# Altium PCB Bus.PcbDoc
Units mm, origin at the board's own origin, x right, y up, seen from the top; angles counter-clockwise.
Board outline 135 x 110 mm, 2 copper layers (Top Layer, Bottom Layer); 31 components, 25 nets, 281 pads, 0 vias.
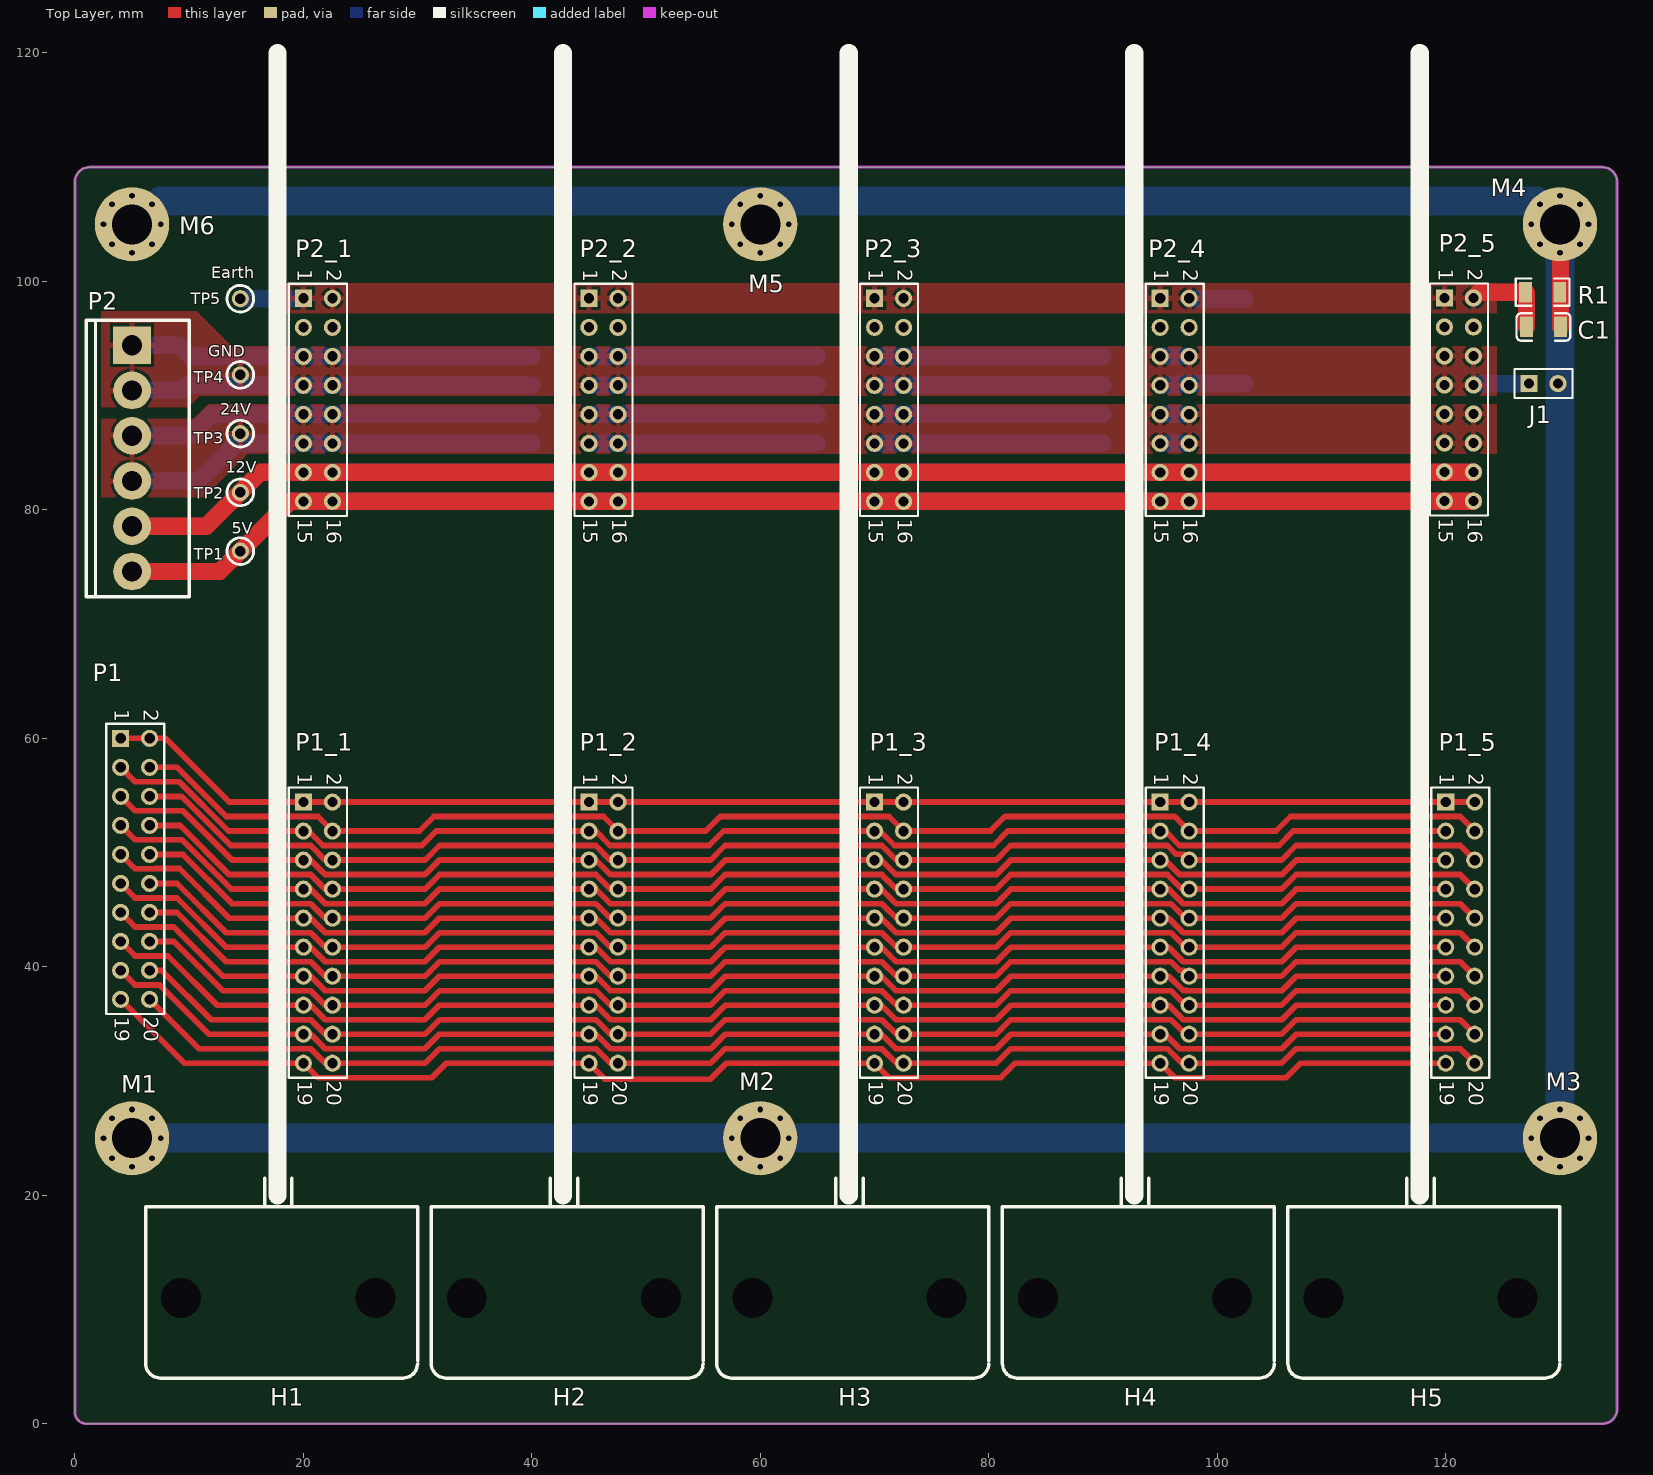
[diagram p0: Top Layer view]
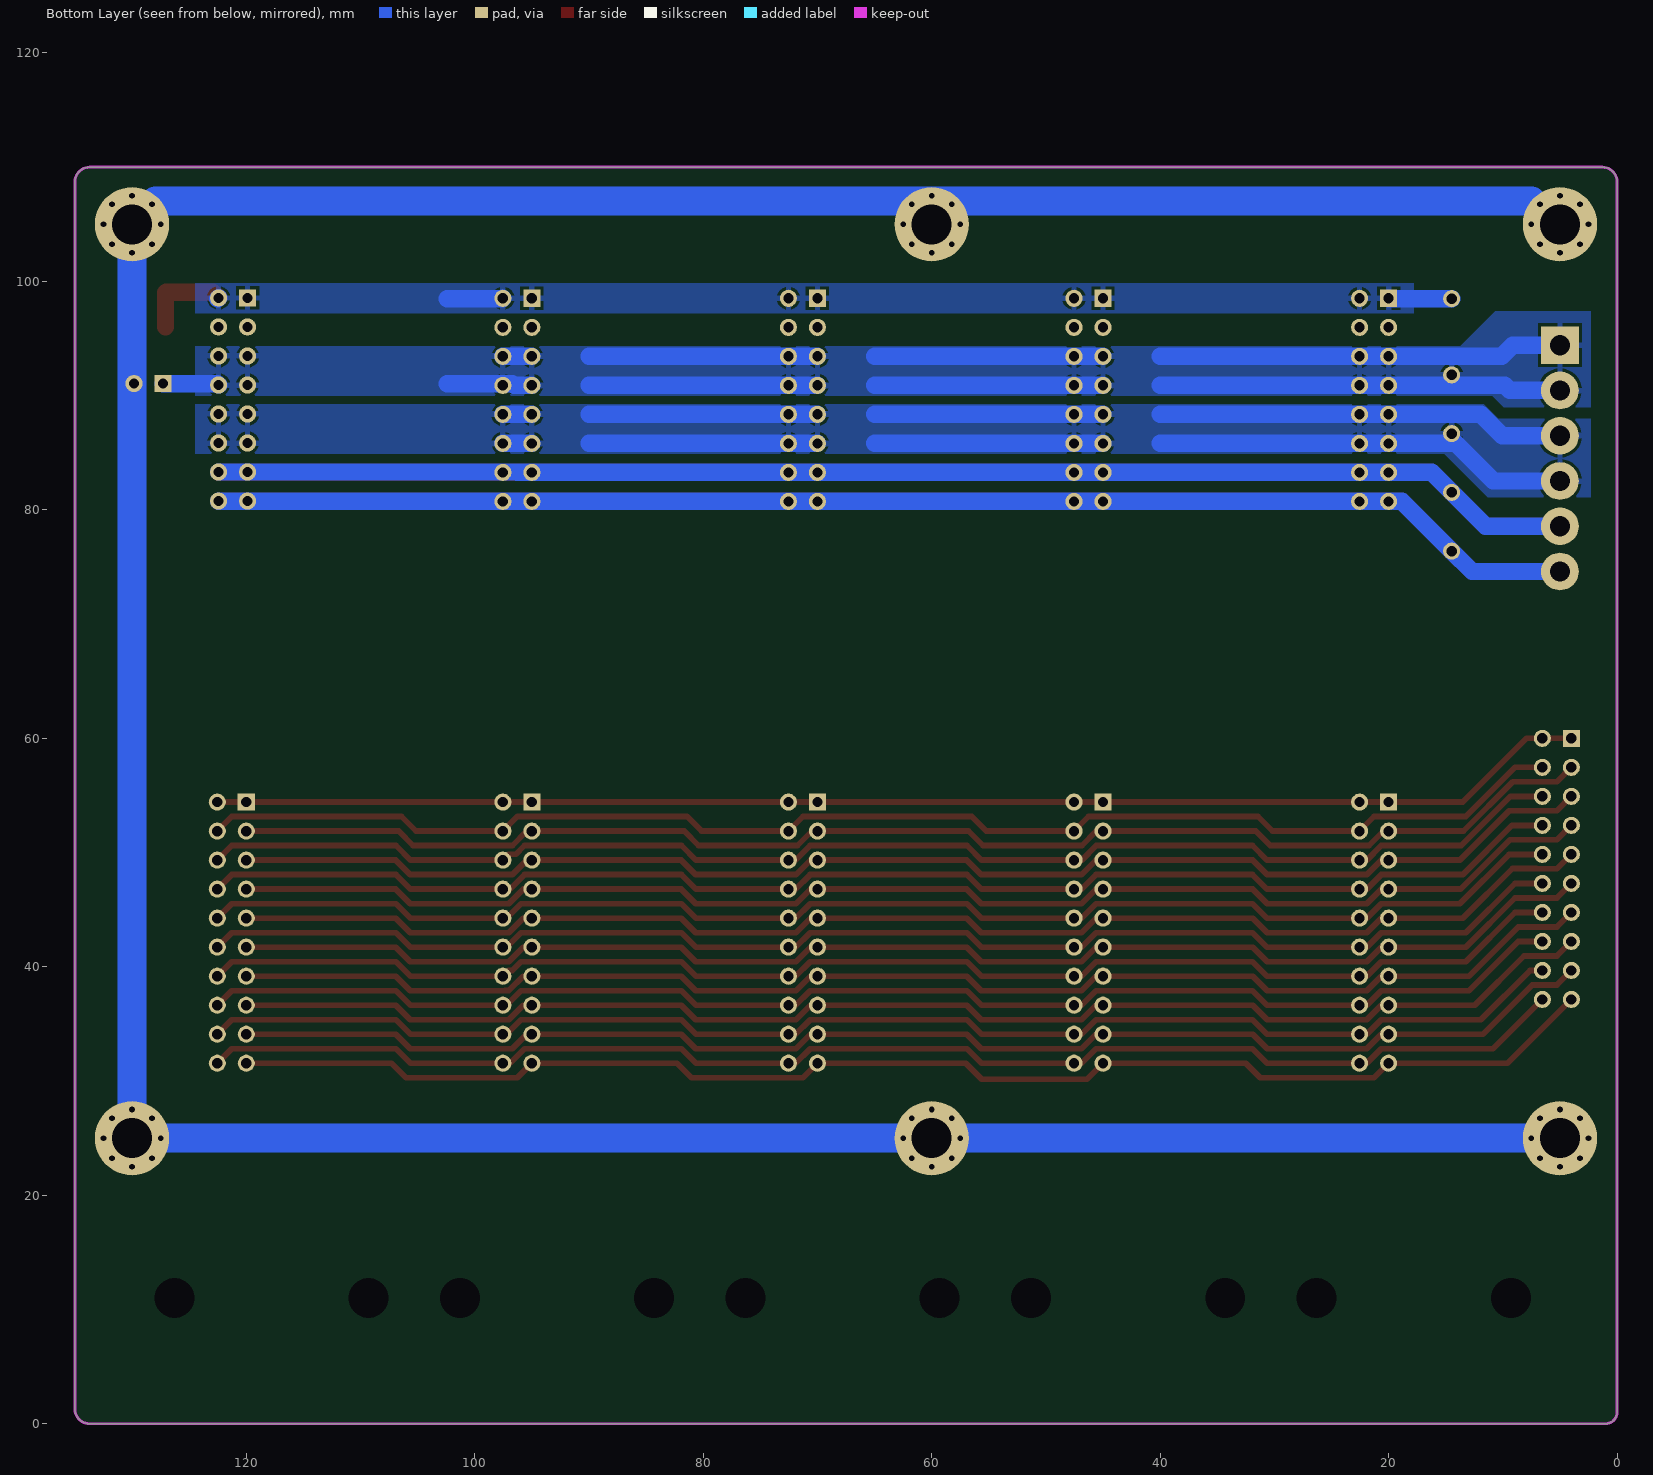
[diagram p1: Bottom Layer view, seen from below]

## Layer stack, top to bottom
Top Solder: solder mask 0.0102, Solder Resist, Dk 3.5
Top Layer: signal copper 0.0356
Dielectric 1: dielectric 0.32, FR-4, Dk 4.8
Bottom Layer: signal copper 0.0356
Bottom Solder: solder mask 0.0102, Solder Resist, Dk 3.5

## Board outline
0,1 ccw(c1,1) 1,0 133.73,0 ccw(c133.73,1.27) 135,1.27 135,108.73 ccw(c133.73,108.73) 133.73,110 1.27,110 ccw(c1.27,108.73) 0,108.73

## Design rules (kind name [scope] priority, off if disabled: settings)
Clearance [All] p1: gap=0.254
PolygonConnect [All] p1: connectstyle=Relief reliefconductorwidth=0.508 reliefentries=4 polygonreliefangle="90 Angle" airgapwidth=0.254
RoomDefinition Bus [InComponentClass('Bus')] p1: confinementstyle=ConfineIn formatcopy=TRUE lockcomponents=FALSE outline 126.426,14.539 157.414,14.539 157.414,24.191 126.426,24.191
RoutingVias [All] p1: holewidth=0.711 width=1.27 viastyle="Through Hole" minholewidth=0.711 minwidth=1.27 maxholewidth=0.711 maxwidth=1.27
SolderMaskExpansion [All] p1: expansion=0.102
Width [All] p1: maxlimit=2.54 minlimit=0.254 preferedwidth=0.508
30 further rules are at their usual default settings.

## Components (designator, comment, footprint, x,y, rotation, side; value= is the part's Value field where it differs from the comment)
C1 "1nF/2KV" 1206_C 128.558,96.012 r180 top
H1 "PCB_HOLD" PCB_HOLD 17.8,11 r180 top
H2 "PCB_HOLD" PCB_HOLD 42.8,11 r180 top
H3 "PCB_HOLD" PCB_HOLD 67.8,11 r180 top
H4 "PCB_HOLD" PCB_HOLD 92.8,11 r180 top
H5 "PCB_HOLD" PCB_HOLD 117.8,11 r180 top
J1 "Header 2" HDR1X2 127.292,91.057 r0 top
M1 "Header 9" LK 5,25 r0 top
M2 "Header 9" LK 60,25 r0 top
M3 "Header 9" LK 130,25 r0 top
M4 "Header 9" LK 130,105 r0 top
M5 "Header 9" LK 60,105 r0 top
M6 "Header 9" LK 5,105 r0 top
P1 "Header 10X2" HDR2X10 4,60 r270 top
P1_1 "Header 10X2" HDR2X10 20,54.417 r270 top
P1_2 "Header 10X2" HDR2X10 45,54.417 r270 top
P1_3 "Header 10X2" HDR2X10 70,54.417 r270 top
P1_4 "Header 10X2" HDR2X10 95,54.417 r270 top
P1_5 "Header 10X2" HDR2X10 120,54.417 r270 top
P2 "Header 6" VH-6 5,94.417 r90 top
P2_1 "Header 8x2" HDR2X8 20,98.519 r270 top
P2_2 "Header 8x2" HDR2X8 45,98.519 r270 top
P2_3 "Header 8x2" HDR2X8 70,98.519 r270 top
P2_4 "Header 8x2" HDR2X8 95,98.519 r270 top
P2_5 "Header 8x2" HDR2X8 119.888,98.552 r270 top
R1 "1M" 1206_R 128.49,99.06 r0 top
TP1 "5V" TP 14.478,76.388 r0 top
TP2 "12V" TP 14.478,81.531 r0 top
TP3 "24V" TP 14.478,86.675 r0 top
TP4 "GND" TP 14.478,91.818 r0 top
TP5 "Earth" TP 14.478,98.486 r0 top

## Footprints (in the part's own frame and the unit in brackets; to place one, negate y for a bottom-side part, rotate by r counter-clockwise, add the part's x,y. Pads: shape width x height; smd on the part's side, far side on the other; paste and mask are expansions set on the pad)
1206_C [mm]
  rect 1.13x1.8 smd: 1(-1.49,0) 2(1.49,0)
  silkscreen extent -2.36,-1.2 2.35,1.2, body extent -1.6,-0.81 1.6,0.79, height 1
1206_R [mm]
  rect 1.13x1.8 smd: 1(-1.49,0) 2(1.49,0)
  silkscreen extent -2.36,-1.2 2.35,1.2, body extent -1.7,-0.86 1.65,0.87, height 0.85
HDR1X2 [mm] "Connector; Header; 2 Position"
  rect 1.5x1.5 hole 0.9: 1(0,0)
  round 1.5 hole 0.9: 2(2.54,0)
  silkscreen extent -1.27,-1.27 3.81,1.27
HDR2X8 [mm] "Connector; Header; 8x2 Position"
  rect 1.5x1.5 hole 0.9: 1(0,0)
  round 1.5 hole 0.9: 2(0,2.54) 3(2.54,0) 4(2.54,2.54) 5(5.08,0) 6(5.08,2.54) 7(7.62,0) 8(7.62,2.54) 9(10.16,0) 10(10.16,2.54) 11(12.7,0) 12(12.7,2.54) 13(15.24,0) 14(15.24,2.54) 15(17.78,0) 16(17.78,2.54)
  silkscreen extent -1.27,-1.27 19.05,3.81
HDR2X10 [mm] "Connector; Header; 10x2 Position"
  rect 1.5x1.5 hole 0.9: 1(0,0)
  round 1.5 hole 0.9: 2(0,2.54) 3(2.54,0) 4(2.54,2.54) 5(5.08,0) 6(5.08,2.54) 7(7.62,0) 8(7.62,2.54) 9(10.16,0) 10(10.16,2.54) 11(12.7,0) 12(12.7,2.54) 13(15.24,0) 14(15.24,2.54) 15(17.78,0) 16(17.78,2.54) 17(20.32,0) 18(20.32,2.54) 19(22.86,0) 20(22.86,2.54)
  silkscreen extent -1.27,-1.27 24.13,3.81
LK [mm]
  round 6.5 hole 3.5: 1(0,0)
  round 1 hole 0.5: 2(0,2.5) 3(2.5,0) 4(0,-2.5) 5(-1.75,-1.75) 6(-1.75,1.75) 7(1.75,1.75) 8(1.75,-1.75) 9(-2.5,0)
PCB_HOLD [mm]
  round 0 hole 3.5 unplated: 1(8.5,0) 2(-8.5,0)
  silkscreen extent -12.19,-10.5 11.61,7
TP [mm] "Connector; Header; 4 Position"
  round 1.5 hole 0.9: 1(0,0)
  silkscreen extent -1.17,-1.17 1.17,1.17
VH-6 [mil]
  rect 130x130 hole 70: 1(0,0)
  round 130 hole 70: 2(-156,0) 3(-312,0) 4(-468,0) 5(-624,0) 6(-780,0)
  silkscreen extent -867,-197 87,157

## Part data
C1: library part CC, "Capacitor"
J1: "Header, 2-Pin"
M1 M2 M3 M4 M5 M6: "Header, 9-Pin"
P1 P1_1 P1_2 P1_3 P1_4 P1_5: "Header, 10-Pin, Dual row"
P2: "Header, 6-Pin"
P2_1 P2_2 P2_3 P2_4 P2_5: "Header, 8-Pin, Dual row"
R1: library part Res2, "Resistor"
TP1 TP2 TP3 TP4 TP5: library part TP, "TP"

## Nets (pads, with @x,y where several pads share a name; then routed paths per layer and width w, separated by ;. In a path a pad name is that pad's centre, name@x,y a point inside that pad or via, vN(x,y) a via of type N, cw(c..) or ccw(c..) an arc to the next point about the centre after c; other vN are vias at no path point)
24V+: P2.3 P2.4 P2_1.9 P2_1.10 P2_1.11 P2_1.12 P2_2.9 P2_2.10 P2_2.11 P2_2.12 P2_3.9 P2_3.10 P2_3.11 P2_3.12 P2_4.9 P2_4.10 P2_4.11 P2_4.12 P2_5.9 P2_5.10 P2_5.11 P2_5.12 TP3.1 | length 157.2
  Bottom Layer w1.524: P2.4 10.843,82.53 14.132,85.819 P2_1.11 P2_1.12 40,85.819 ; P2.3 10.057,86.492 11.924,88.359 P2_1.9 P2_1.10 40,88.359 ; P2_2.11 P2_2.12 65,85.819 ; P2_2.9 P2_2.10 65,88.359 ; P2_3.11 P2_3.12 90,85.819 ; P2_3.9 P2_3.10 90,88.359 ; P2_4.11 P2_4.12 ; P2_4.9 P2_4.10
EARTH: C1.1 J1.2 M1.1 M1.2 M1.3 M1.4 M1.5 M1.6 M1.7 M1.8 M1.9 M2.1 M2.2 M2.3 M2.4 M2.5 M2.6 M2.7 M2.8 M2.9 M3.1 M3.2 M3.3 M3.4 M3.5 M3.6 M3.7 M3.8 M3.9 M4.1 M4.2 M4.3 M4.4 M4.5 M4.6 M4.7 M4.8 M4.9 M5.1 M5.2 M5.3 M5.4 M5.5 M5.6 M5.7 M5.8 M5.9 M6.1 M6.2 M6.3 M6.4 M6.5 M6.6 M6.7 M6.8 M6.9 R1.2 | length 340.6
  Top Layer w1.524: M4.1 130.048,104.952 C1.1
  Bottom Layer w2.54: M1.1 M1.3 127.5,25 130,25 M3.2 M4.4 M4.1 M4.6 127.968,107.032 7.5,107.032 M6.1
EARTH1: C1.2 P2_1.1 P2_1.2 P2_2.1 P2_2.2 P2_3.1 P2_3.2 P2_4.1 P2_4.2 P2_5.1 P2_5.2 R1.1 TP5.1 | length 18.4
  Top Layer w1.524: P2_5.2 122.936,99.06 R1.1 127.068,98.992 C1.2
  Bottom Layer w1.524: TP5.1 19.967,98.486 P2_1.1 ; P2_4.2 97.573,98.486 102.4,98.486 ; P2_5.2 P2_5.2@122.494,98.486
GND24V: J1.1 P2.1 P2.2 P2_1.5 P2_1.6 P2_1.7 P2_1.8 P2_2.5 P2_2.6 P2_2.7 P2_2.8 P2_3.5 P2_3.6 P2_3.7 P2_3.8 P2_4.5 P2_4.6 P2_4.7 P2_4.8 P2_5.5 P2_5.6 P2_5.7 P2_5.8 TP4.1 | length 165.5
  Bottom Layer w1.524: P2.2 9.384,90.455 9.828,90.899 P2_1.7 P2_1.8 40,90.899 ; P2.1 9.13,94.417 10.108,93.439 P2_1.5 P2_1.6 40,93.439 ; P2_2.7 P2_2.8 65,90.899 ; P2_2.5 P2_2.6 65,93.439 ; P2_3.7 P2_3.8 90,90.899 ; P2_3.5 P2_3.6 90,93.439 ; P2_4.7 96.544,90.899 96.702,91.057 102.4,91.057 ; P2_4.5 P2_4.6 ; P2_5.8 122.553,91.057 J1.1
NetP2_5: P2.5 P2_1.13 P2_1.14 P2_2.13 P2_2.14 P2_3.13 P2_3.14 P2_4.13 P2_4.14 P2_5.13 P2_5.14 TP2.1 | length 239.6
  Top Layer w1.524: P2.5@5.288,78.279 P2.5 11.514,78.567 TP2.1 16.226,83.279 P2_1.13 P2_1.14 P2_2.13 P2_2.14 P2_3.13 P2_3.14 P2_4.13 P2_4.14 122.395,83.279 P2_5.14
  Bottom Layer w1.524: P2.5@5.288,78.279 P2.5 11.514,78.567 TP2.1 16.226,83.279 P2_1.13 P2_1.14 P2_2.13 P2_2.14 P2_3.13 P2_3.14 P2_4.13 96.27,83.279 96.303,83.312 P2_5.13 P2_5.14
NetP2_6: P2.6 P2_1.15 P2_1.16 P2_2.15 P2_2.16 P2_3.15 P2_3.16 P2_4.15 P2_4.16 P2_5.15 P2_5.16 TP1.1 | length 240
  Top Layer w1.524: P2.6 12.695,74.605 TP1.1 18.829,80.739 P2_1.15 P2_1.16 P2_2.15 P2_2.16 P2_3.15 P2_3.16 P2_4.15 P2_4.16 122.395,80.739 P2_5.16
  Bottom Layer w1.524: P2.6 12.695,74.605 TP1.1 18.829,80.739 P2_1.15 P2_1.16 P2_2.15 P2_2.16 P2_3.15 P2_3.16 P2_4.15 P2_4.16 122.395,80.739 P2_5.16
P1_1: P1.1 P1.2 P1_1.1 P1_1.2 P1_2.1 P1_2.2 P1_3.1 P1_3.2 P1_4.1 P1_4.2 P1_5.1 P1_5.2 | length 120.9
  Top Layer w0.508: P1.1 P1.2 7.925,60 13.508,54.417 P1_1.1 P1_1.2 P1_2.1 P1_2.2 P1_3.1 P1_3.2 P1_4.1 P1_4.2 P1_5.1 P1_5.2
P1_3: P1.3 P1_1.3 P1_2.3 P1_3.3 P1_4.3 P1_5.3 | length 122.5
  Top Layer w0.508: P1.3 5.258,56.202 9.121,56.202 13.446,51.877 P1_1.3 20.447,51.877 21.705,50.619 30.365,50.619 31.623,51.877 P1_2.3 45.593,51.877 46.851,50.619 55.511,50.619 56.769,51.877 P1_3.3 70.485,51.877 71.743,50.619 80.403,50.619 81.661,51.877 P1_4.3 95.443,51.877 96.701,50.619 105.403,50.619 106.661,51.877 P1_5.3
P1_4: P1.4 P1_1.4 P1_2.4 P1_3.4 P1_4.4 P1_5.4 | length 122.5
  Top Layer w0.508: P1.4 8.941,57.46 13.254,53.147 21.27,53.147 P1_1.4 30.16,51.877 31.43,53.147 46.27,53.147 P1_2.4 55.226,51.877 56.496,53.147 71.27,53.147 P1_3.4 80.137,51.877 81.407,53.147 96.27,53.147 P1_4.4 105.137,51.877 106.407,53.147 121.27,53.147 P1_5.4
P1_5: P1.5 P1_1.5 P1_2.5 P1_3.5 P1_4.5 P1_5.5 | length 122.5
  Top Layer w0.508: P1.5 5.258,53.662 9.437,53.662 13.762,49.337 P1_1.5 20.635,49.337 21.905,48.067 30.617,48.067 31.887,49.337 P1_2.5 45.625,49.337 46.895,48.067 55.658,48.067 56.928,49.337 P1_3.5 70.615,49.337 71.885,48.067 80.648,48.067 81.918,49.337 P1_4.5 95.443,49.337 96.713,48.067 105.648,48.067 106.918,49.337 P1_5.5
P1_6: P1.6 P1_1.6 P1_2.6 P1_3.6 P1_4.6 P1_5.6 | length 122.5
  Top Layer w0.508: P1.6 9.326,54.92 13.639,50.607 20.639,50.607 21.909,49.337 P1_1.6 30.643,49.337 31.913,50.607 45.593,50.607 46.863,49.337 P1_2.6 55.632,49.337 56.902,50.607 70.64,50.607 71.91,49.337 P1_3.6 80.622,49.337 81.892,50.607 95.635,50.607 96.385,49.857 97.02,49.857 P1_4.6 105.622,49.337 106.892,50.607 121.27,50.607 P1_5.6
P1_7: P1.7 P1_1.7 P1_2.7 P1_3.7 P1_4.7 P1_5.7 | length 122.5
  Top Layer w0.508: P1.7 5.258,51.122 9.375,51.122 13.7,46.797 P1_1.7 20.635,46.797 21.905,45.527 30.617,45.527 31.887,46.797 P1_2.7 45.625,46.797 46.895,45.527 55.658,45.527 56.928,46.797 P1_3.7 70.615,46.797 71.885,45.527 80.648,45.527 81.918,46.797 P1_4.7 95.761,46.797 97.031,45.527 105.648,45.527 106.918,46.797 P1_5.7
P1_8: P1.8 P1_1.8 P1_2.8 P1_3.8 P1_4.8 P1_5.8 | length 122.5
  Top Layer w0.508: P1.8 9.195,52.38 13.508,48.067 20.635,48.067 21.905,46.797 P1_1.8 30.643,46.797 31.913,48.067 45.625,48.067 46.895,46.797 P1_2.8 55.632,46.797 56.902,48.067 70.64,48.067 71.91,46.797 P1_3.8 80.622,46.797 81.892,48.067 95.635,48.067 96.905,46.797 P1_4.8 105.622,46.797 106.892,48.067 121.27,48.067 P1_5.8
P1_9: P1.9 P1_1.9 P1_2.9 P1_3.9 P1_4.9 P1_5.9 | length 122.5
  Top Layer w0.508: P1.9 5.258,48.582 7.061,48.582 7.082,48.603 9.162,48.603 13.508,44.257 P1_1.9 20.635,44.257 21.905,42.987 30.617,42.987 31.887,44.257 P1_2.9 45.625,44.257 46.895,42.987 55.658,42.987 56.928,44.257 P1_3.9 70.615,44.257 71.885,42.987 80.648,42.987 81.918,44.257 P1_4.9 95.761,44.257 97.031,42.987 105.648,42.987 106.918,44.257 P1_5.9
P1_10: P1.10 P1_1.10 P1_2.10 P1_3.10 P1_4.10 P1_5.10 | length 122.5
  Top Layer w0.508: P1.10 9.449,49.84 13.762,45.527 20.635,45.527 21.905,44.257 P1_1.10 30.643,44.257 31.913,45.527 45.625,45.527 46.895,44.257 P1_2.10 55.632,44.257 56.902,45.527 70.64,45.527 71.91,44.257 P1_3.10 80.622,44.257 81.892,45.527 95.953,45.527 97.223,44.257 P1_4.10 105.622,44.257 106.892,45.527 121.27,45.527 P1_5.10
P1_11: P1.11 P1_1.11 P1_2.11 P1_3.11 P1_4.11 P1_5.11 | length 122.5
  Top Layer w0.508: P1.11 5.27,46.03 8.941,46.03 13.254,41.717 P1_1.11 20.635,41.717 21.905,40.447 30.617,40.447 31.887,41.717 P1_2.11 45.625,41.717 46.895,40.447 55.658,40.447 56.928,41.717 P1_3.11 70.615,41.717 71.885,40.447 80.648,40.447 81.918,41.717 P1_4.11 95.761,41.717 97.031,40.447 105.648,40.447 106.918,41.717 P1_5.11
P1_12: P1.12 P1_1.12 P1_2.12 P1_3.12 P1_4.12 P1_5.12 | length 122.5
  Top Layer w0.508: P1.12 8.941,47.3 13.254,42.987 20.635,42.987 21.905,41.717 P1_1.12 30.643,41.717 31.913,42.987 45.625,42.987 46.895,41.717 P1_2.12 55.632,41.717 56.902,42.987 70.64,42.987 71.91,41.717 P1_3.12 80.622,41.717 81.892,42.987 95.953,42.987 97.223,41.717 P1_4.12 105.622,41.717 106.892,42.987 121.27,42.987 P1_5.12
P1_13: P1.13 P1_1.13 P1_2.13 P1_3.13 P1_4.13 P1_5.13 | length 122.5
  Top Layer w0.508: P1.13 5.27,43.49 8.654,43.49 12.967,39.177 P1_1.13 20.635,39.177 21.905,37.907 30.617,37.907 31.887,39.177 P1_2.13 45.625,39.177 46.895,37.907 55.658,37.907 56.928,39.177 P1_3.13 70.615,39.177 71.885,37.907 80.648,37.907 81.918,39.177 P1_4.13 95.761,39.177 97.019,37.919 97.336,37.919 97.348,37.907 105.648,37.907 106.918,39.177 P1_5.13
P1_14: P1.14 P1_1.14 P1_2.14 P1_3.14 P1_4.14 P1_5.14 | length 122.5
  Top Layer w0.508: P1.14 8.941,44.76 13.254,40.447 20.635,40.447 21.905,39.177 P1_1.14 30.643,39.177 31.913,40.447 45.625,40.447 46.895,39.177 P1_2.14 55.632,39.177 56.902,40.447 70.64,40.447 71.91,39.177 P1_3.14 80.622,39.177 81.892,40.447 95.953,40.447 96.715,39.685 97.032,39.685 P1_4.14 105.622,39.177 106.892,40.447 121.27,40.447 P1_5.14
P1_15: P1.15 P1_1.15 P1_2.15 P1_3.15 P1_4.15 P1_5.15 | length 122.5
  Top Layer w0.508: P1.15 5.27,40.95 8.146,40.95 12.459,36.637 P1_1.15 20.635,36.637 21.905,35.367 30.617,35.367 31.887,36.637 P1_2.15 45.625,36.637 46.895,35.367 55.658,35.367 56.928,36.637 P1_3.15 70.615,36.637 71.885,35.367 80.648,35.367 81.918,36.637 P1_4.15 95.761,36.637 97.031,35.367 105.648,35.367 106.918,36.637 P1_5.15
P1_16: P1.16 P1_1.16 P1_2.16 P1_3.16 P1_4.16 P1_5.16 | length 122.5
  Top Layer w0.508: P1.16 8.654,42.22 12.967,37.907 20.635,37.907 21.905,36.637 P1_1.16 30.643,36.637 31.913,37.907 45.625,37.907 46.895,36.637 P1_2.16 55.632,36.637 56.902,37.907 70.64,37.907 71.91,36.637 P1_3.16 80.622,36.637 81.892,37.907 95.953,37.907 97.223,36.637 P1_4.16 105.622,36.637 106.892,37.907 121.27,37.907 P1_5.16
P1_17: P1.17 P1_1.17 P1_2.17 P1_3.17 P1_4.17 P1_5.17 | length 122.5
  Top Layer w0.508: P1.17 5.27,38.41 7.417,38.41 8.4,37.427 11.73,34.097 P1_1.17 20.635,34.097 21.905,32.827 30.617,32.827 31.887,34.097 P1_2.17 45.625,34.097 46.895,32.827 55.658,32.827 56.928,34.097 P1_3.17 70.615,34.097 71.885,32.827 80.648,32.827 81.918,34.097 P1_4.17 95.443,34.097 96.713,32.827 105.648,32.827 106.918,34.097 P1_5.17
P1_18: P1.18 P1_1.18 P1_2.18 P1_3.18 P1_4.18 P1_5.18 | length 122.5
  Top Layer w0.508: P1.18 7.609,39.68 11.922,35.367 20.635,35.367 21.905,34.097 P1_1.18 30.643,34.097 31.913,35.367 45.625,35.367 46.895,34.097 P1_2.18 55.632,34.097 56.902,35.367 70.64,35.367 71.91,34.097 P1_3.18 80.622,34.097 81.892,35.367 95.953,35.367 97.223,34.097 P1_4.18 105.622,34.097 106.892,35.367 121.27,35.367 P1_5.18
P1_19: P1.19 P1_1.19 P1_2.19 P1_3.19 P1_4.19 P1_5.19 | length 122.6
  Top Layer w0.508: P1.19 9.583,31.557 P1_1.19 21.27,30.287 31.242,30.287 32.512,31.557 P1_2.19 46.397,30.16 55.626,30.16 57.023,31.557 P1_3.19 71.27,30.287 81.026,30.287 82.296,31.557 P1_4.19 96.27,30.287 106.026,30.287 107.296,31.557 P1_5.19
P1_20: P1.20 P1_1.20 P1_2.20 P1_3.20 P1_4.20 P1_5.20 | length 122.5
  Top Layer w0.508: P1.20 10.853,32.827 20.635,32.827 21.905,31.557 P1_1.20 30.643,31.557 31.913,32.827 45.625,32.827 46.895,31.557 P1_2.20 55.632,31.557 56.902,32.827 70.64,32.827 71.91,31.557 P1_3.20 80.622,31.557 81.892,32.827 95.635,32.827 96.905,31.557 P1_4.20 105.622,31.557 106.892,32.827 121.27,32.827 P1_5.20
pads on no net: H1.1 H1.2 H2.1 H2.2 H3.1 H3.2 H4.1 H4.2 H5.1 H5.2 P2_1.3 P2_1.4 P2_2.3 P2_2.4 P2_3.3 P2_3.4 P2_4.3 P2_4.4 P2_5.3 P2_5.4

## Polygon pours and split planes (outlines as drawn)
GND24V on Bottom Layer "NONET_L-01_P-001" (solid, remove dead copper, pour order 0): 2.286,97.376 10.668,97.376 13.716,94.328 124.46,94.328 124.46,90.01 13.716,90.01 10.922,90.01 10.16,89.248 9.906,88.994 2.286,88.994
24V+ on Bottom Layer "NONET_L-01_P-001" (solid, remove dead copper, pour order 4): 2.286,87.978 10.414,87.978 11.684,89.248 124.46,89.248 124.46,84.93 15.146,84.93 11.336,81.12 2.286,81.12
EARTH1 on Bottom Layer "NONET_L-01_P-001" (solid, remove dead copper, pour order 10): 17.78,99.822 124.46,99.822 124.46,97.216 17.78,97.216
GND24V on Top Layer "NONET_L-01_P-001" (solid, remove dead copper, pour order 2): 2.286,97.376 10.668,97.376 13.716,94.328 124.46,94.328 124.46,90.01 13.716,90.01 10.922,90.01 10.16,89.248 9.906,88.994 2.286,88.994
24V+ on Top Layer "NONET_L-01_P-001" (solid, remove dead copper, pour order 6): 2.286,87.978 10.414,87.978 11.684,89.248 124.46,89.248 124.46,84.93 15.146,84.93 11.336,81.12 2.286,81.12
EARTH1 on Top Layer "NONET_L-01_P-001" (solid, remove dead copper, pour order 8): 17.78,99.822 124.46,99.822 124.46,97.216 17.78,97.216

## Keep-outs
Keep-Out Layer:
  the board outline again, w0.254

## Silkscreen, mask and mechanical layers (free items; w line width, h text height)
Top Overlay:
  lines w1.6: 17.73,20 17.73,120 ; 42.73,20 42.73,120 ; 67.73,20 67.73,120 ; 92.73,20 92.73,120 ; 117.73,20 117.73,120

## Dimensions
0,1 to 135,1.27 on Top Overlay
17.734,30.301 to 42.734,30.301 on Top Overlay
133.73,0 to 133.73,110 on Top Overlay

## Text inside footprints (layer, text, board x,y; h text height)
P1: Top Overlay "2" at 6.032,62.54 h1.27 r270; Top Overlay "1" at 3.492,62.54 h1.27 r270; Top Overlay "19" at 3.492,35.616 h1.27 r270; Top Overlay "20" at 6.032,35.616 h1.27 r270
P1_1: Top Overlay "2" at 22.032,56.957 h1.27 r270; Top Overlay "1" at 19.492,56.957 h1.27 r270; Top Overlay "19" at 19.492,30.033 h1.27 r270; Top Overlay "20" at 22.032,30.033 h1.27 r270
P1_2: Top Overlay "2" at 47.032,56.957 h1.27 r270; Top Overlay "1" at 44.492,56.957 h1.27 r270; Top Overlay "19" at 44.492,30.033 h1.27 r270; Top Overlay "20" at 47.032,30.033 h1.27 r270
P1_3: Top Overlay "2" at 72.032,56.957 h1.27 r270; Top Overlay "1" at 69.492,56.957 h1.27 r270; Top Overlay "19" at 69.492,30.033 h1.27 r270; Top Overlay "20" at 72.032,30.033 h1.27 r270
P1_4: Top Overlay "2" at 97.032,56.957 h1.27 r270; Top Overlay "1" at 94.492,56.957 h1.27 r270; Top Overlay "19" at 94.492,30.033 h1.27 r270; Top Overlay "20" at 97.032,30.033 h1.27 r270
P1_5: Top Overlay "2" at 122.032,56.957 h1.27 r270; Top Overlay "1" at 119.492,56.957 h1.27 r270; Top Overlay "19" at 119.492,30.033 h1.27 r270; Top Overlay "20" at 122.032,30.033 h1.27 r270
P2_1: Top Overlay "16" at 22.032,79.215 h1.27 r270; Top Overlay "15" at 19.492,79.215 h1.27 r270; Top Overlay "1" at 19.492,101.059 h1.27 r270; Top Overlay "2" at 22.032,101.059 h1.27 r270
P2_2: Top Overlay "16" at 47.032,79.215 h1.27 r270; Top Overlay "15" at 44.492,79.215 h1.27 r270; Top Overlay "1" at 44.492,101.059 h1.27 r270; Top Overlay "2" at 47.032,101.059 h1.27 r270
P2_3: Top Overlay "16" at 72.032,79.215 h1.27 r270; Top Overlay "15" at 69.492,79.215 h1.27 r270; Top Overlay "1" at 69.492,101.059 h1.27 r270; Top Overlay "2" at 72.032,101.059 h1.27 r270
P2_4: Top Overlay "16" at 97.032,79.215 h1.27 r270; Top Overlay "15" at 94.492,79.215 h1.27 r270; Top Overlay "1" at 94.492,101.059 h1.27 r270; Top Overlay "2" at 97.032,101.059 h1.27 r270
P2_5: Top Overlay "16" at 121.92,79.248 h1.27 r270; Top Overlay "15" at 119.38,79.248 h1.27 r270; Top Overlay "1" at 119.38,101.092 h1.27 r270; Top Overlay "2" at 121.92,101.092 h1.27 r270